# Altium PCB PCB1.PcbDoc
Units mil, origin at the board's own origin, x right, y up, seen from the top; angles counter-clockwise.
Board outline 6000 x 4000 mil, 2 copper layers (Top Layer, Bottom Layer); 147 components, 144 nets, 687 pads, 0 vias.
Unrouted connection lines stored in the file: 398.
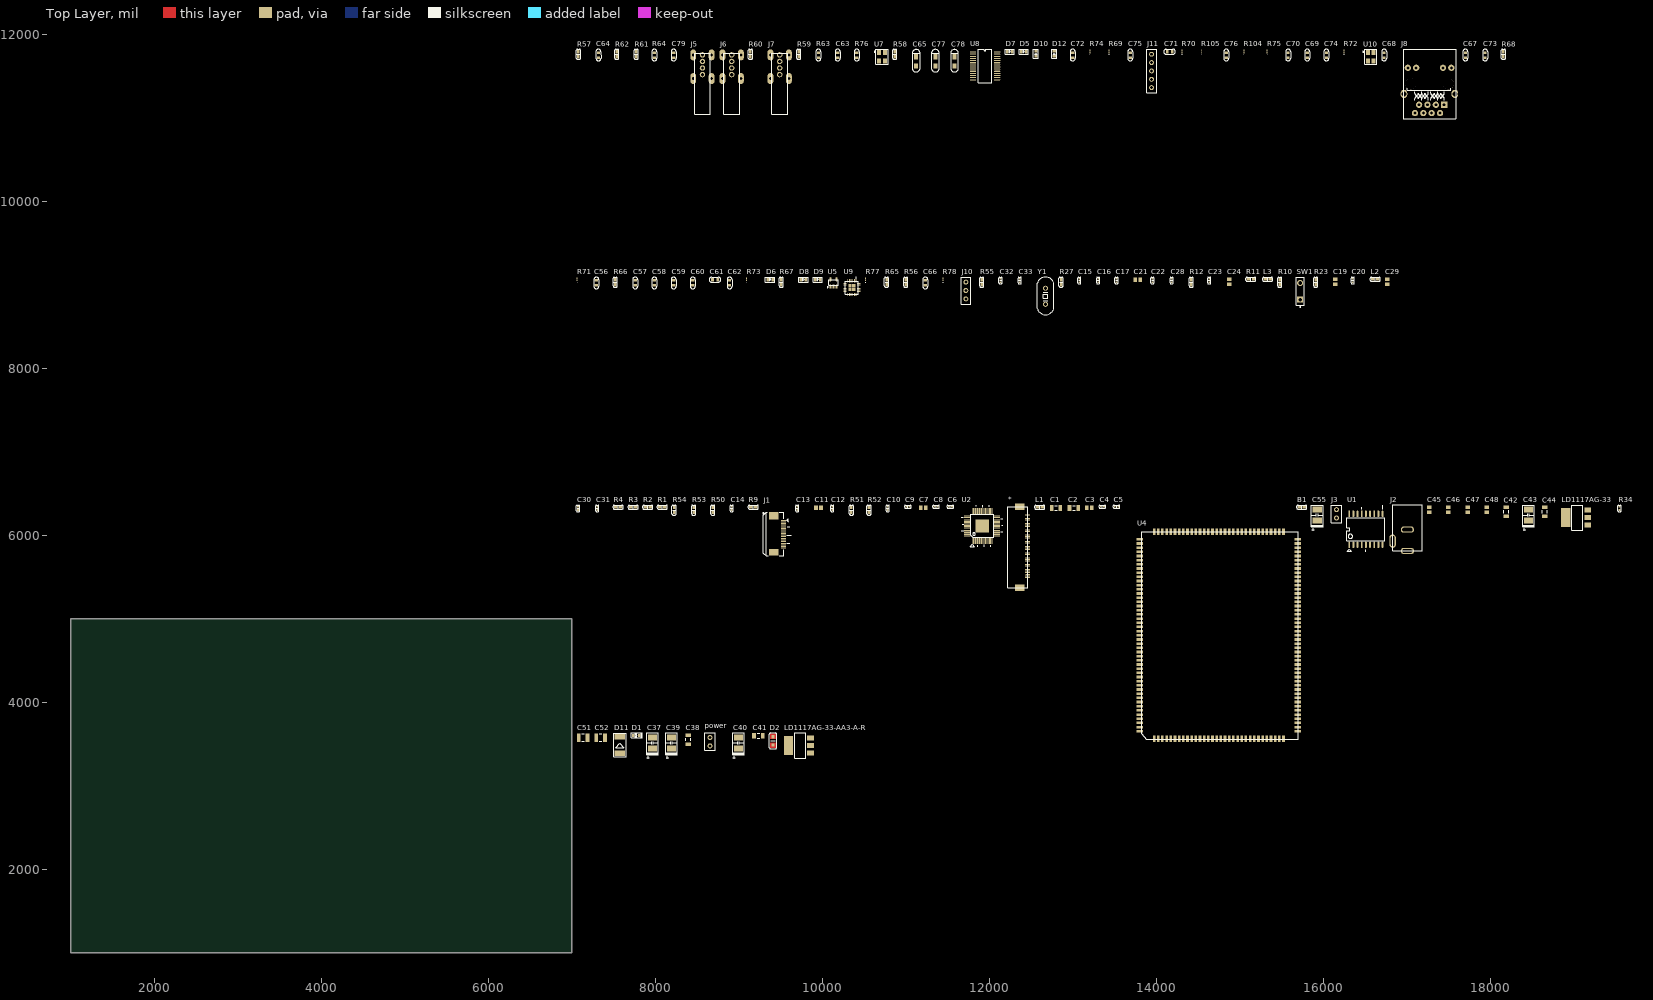
[diagram p0: Top Layer view]
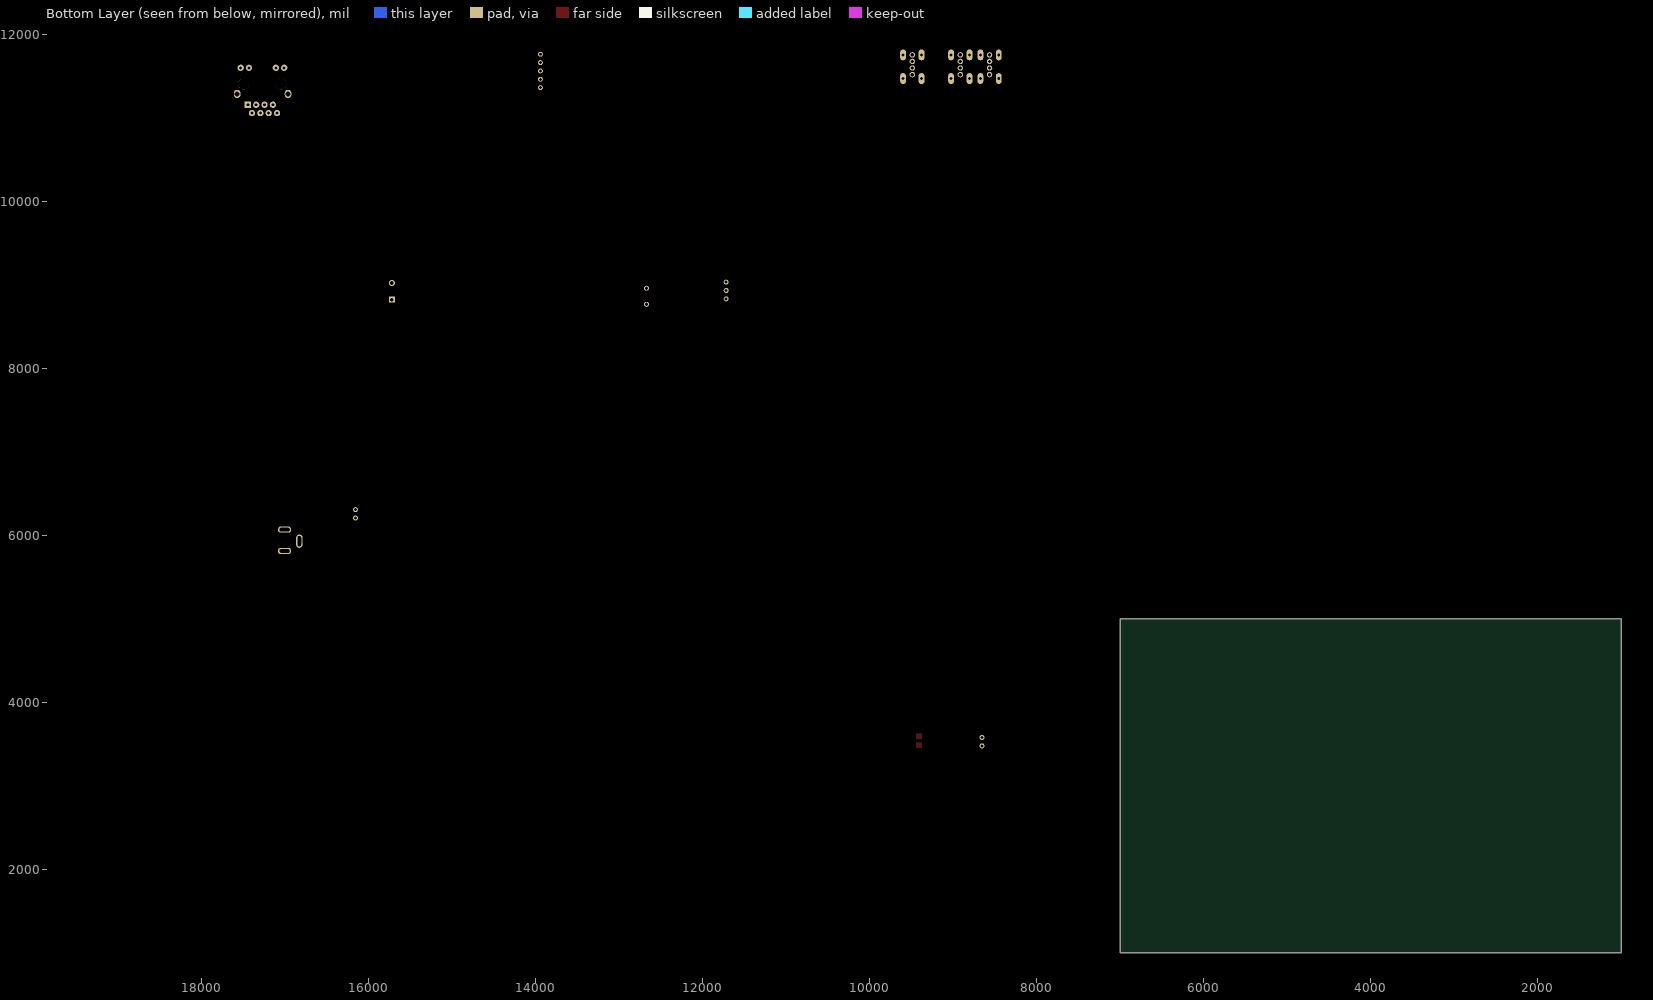
[diagram p1: Bottom Layer view, seen from below]

## Layer stack, top to bottom
Top Layer: signal copper 1.4
Dielectric: dielectric 12.6, FR-4, Dk 4.8
Bottom Layer: signal copper 1.4

## Board outline
1000,1000 7000,1000 7000,5000 1000,5000

## Design rules (kind name [scope] priority, off if disabled: settings)
Clearance [All] p1: gap=10
PolygonConnect [All] p1: connectstyle=Relief reliefconductorwidth=10 reliefentries=4 polygonreliefangle="90 Angle"
RoomDefinition V72单CIS [InComponentClass('V72单CIS')] p1: confinementstyle=ConfineIn formatcopy=TRUE lockcomponents=FALSE outline 7045,3310 19715,3310 19715,11930 7045,11930
RoutingVias [All] p1: holewidth=28 width=50 viastyle="Through Hole" minholewidth=28 minwidth=50 maxholewidth=28 maxwidth=50
SilkscreenOverComponentPads SilkToSolderMaskClearance [IsPad] p1: minsilkscreentomaskgap=10
SolderMaskExpansion [All] p1: expansion=4
Width [All] p1: maxlimit=10 minlimit=10 preferedwidth=10
27 further rules are at their usual default settings.

## Components (designator, comment, footprint, x,y, rotation, side; value= is the part's Value field where it differs from the comment)
* "FPC-40PIN" FPC-40PIN 12355,5865 r90 top
B1 "600R_BEAD" R0603 15745,6335 r0 top
C1 "22uF" C1206 12800,6325 r0 top
C2 "22uF" C1206 13015,6325 r0 top
C3 "10uF" C0805 13200,6330 r0 top
C4 "0.1uF" C0402 18945,6810 r0 top
C5 "0.1uF" C0402 19115,6810 r0 top
C6 "0.1uF" C0402 17125,6810 r0 top
C7 "10uF" C0805 11210,6330 r0 top
C8 "0.1uF" C0402 16955,6810 r0 top
C9 "0.1uF" C0402 16615,6810 r0 top
C10 "0.1uF" C0402 10315,11910 r90 top
C11 "10uF" C0805 9955,6330 r0 top
C12 "0.1uF" C0402 9650,11910 r90 top
C13 "0.1uF" C0402 9230,11910 r90 top
C14 "0.1uF" C0402 8445,11910 r90 top
C15 "100pF" C0402 12610,14640 r90 top
C16 "100pF" C0402 12835,14640 r90 top
C17 "100pF" C0402 13055,14640 r90 top
C19 "10uF" C0805 16145,9035 r90 top
C20 "0.1uF" C0402 15885,14640 r90 top
C21 "10uF" C0805 13780,9060 r0 top
C22 "0.1uF" C0402 13485,14640 r90 top
C23 "0.1uF" C0402 14165,14640 r90 top
C24 "10uF" C0805 14875,9035 r90 top
C28 "0.1uF" C0402 13715,14640 r90 top
C29 "10uF" C0805 16770,9035 r90 top
C30 "0.1uF" C0402 6605,11910 r90 top
C31 "0.1uF" C0402 6835,11910 r90 top
C32 "20pF" C0402 11665,14640 r90 top
C33 "20pF" C0402 11895,14640 r90 top
C37 "100uF" BCASE 7960,3510 r90 top
C38 "10uF" C1206 8395,3550 r90 top
C39 "100uF" BCASE 8190,3510 r90 top
C40 "100uF" BCASE 8990,3510 r90 top
C41 "10uF" C1206 9235,3595 r0 top
C42 "10uF" C1206 18195,6280 r90 top
C43 "100uF" BCASE 18455,6240 r90 top
C44 "10uF" C1206 18655,6280 r90 top
C45 "10uF" C0805 17270,6305 r90 top
C46 "10uF" C0805 17500,6305 r90 top
C47 "10uF" C0805 17730,6305 r90 top
C48 "10uF" C0805 17960,6305 r90 top
C51 "100uF" C1210 7135,3575 r0 top
C52 "100uF" C1210 7345,3575 r0 top
C55 "100uF" BCASE 15925,6240 r90 top
C56 "10uF" 0603A 7295,9020 r90 top
C57 "1uF" 0603A 7760,9020 r90 top
C58 "10uF" 0603A 7990,9020 r90 top
C59 "1uF" 0603A 8220,9020 r90 top
C60 "1uF" 0603A 8450,9020 r90 top
C61 "1uF" 0603A 8715,9060 r0 top
C62 "1uF" 0603A 8890,9020 r90 top
C63 "33pF" 0603A 10185,11750 r90 top
C64 "33pF" 0603A 7320,11750 r90 top
C65 "10uF" 3126A 11095,11680 r90 top
C66 "104" 0603A 11235,9020 r90 top
C67 "104" 0603A 17705,11750 r90 top
C68 "104" 0603A 16730,11750 r90 top
C69 "104" 0603A 15810,11750 r90 top
C70 "104" 0603A 15580,11750 r90 top
C71 "104" 0603A 14160,11790 r0 top
C72 "104" 0603A 13000,11750 r90 top
C73 "104" 0603A 17940,11750 r90 top
C74 "22pF" 0603A 16040,11750 r90 top
C75 "22pF" 0603A 13690,11750 r90 top
C76 "103" 0603A 14840,11750 r90 top
C77 "10uF" 3126A 11325,11680 r90 top
C78 "10uF" 3126A 11555,11680 r90 top
C79 "1uF" 0603A 8220,11750 r90 top
D1 "LED0" LED_0603 7770,3600 r0 top
D2 "DIODE" R1206 9405,3535 r90 top
D5 "ESD5" ESD_0603 12415,11795 r0 top
D6 "ESD6" ESD_0603 9375,9065 r0 top
D7 "ESD7" ESD_0603 12245,11795 r0 top
D8 "ESD8" ESD_0603 9775,9065 r0 top
D9 "ESD9" ESD_0603 9945,9065 r0 top
D10 "ESD10" ESD_0603 12555,11765 r90 top
D11 "TVS1" DO-214AB 7575,3475 r90 top
D12 "ESD12" ESD_0603 12775,11765 r90 top
J1 "18PIN_CIS" 18PIN_FPC 9440,5970 r0 top
J2 "DC-5V" DC-5V 17010,5810 r0 top
J3 "2PIN_PITCH_2.54MM" 2PIN_PITCH_2.54MM 29795,10980 r0 top
J5 "USB-A8" USB-A8 8565,11595 r0 top
J6 "USB-A8" USB-A8 8915,11595 r0 top
J7 "USB-A8" USB-A8 9490,11595 r0 top
J8 "RJ-45A12" RJ-45A12 17450,11155 r90 top
J10 "header3_2.54MM" HEADER3_2.54MM 11715,8910 r0 top
J11 "HEADER5*2_2.54MM" HEADER5_2.54MM 13945,11560 r0 top
L1 "PBY201209T-121Y-N" R0603 12605,6335 r0 top
L2 "CBG100505U301" R0603 16625,9065 r0 top
L3 "CBG100505U301" R0603 15335,9065 r0 top
LD1117AG-33 "SOT-223" SOT-223 19045,6210 r90 top
LD1117AG-33-AA3-A-R "SOT-223" SOT-223 9735,3480 r90 top
power "2PIN_PITCH_2.54MM" 2PIN_PITCH_2.54MM 22290,8250 r0 top
R1 "2" R0603 8085,6335 r0 top
R2 "18" R0603 7910,6335 r0 top
R3 "2" R0603 7735,6335 r0 top
R4 "27" R0603 7555,6335 r0 top
R9 "2" R0603 9175,6335 r0 top
R10 "22" R0603 15480,9030 r90 top
R11 "22" R0603 15135,9065 r0 top
R12 "22" R0603 14420,9030 r90 top
R23 "1K" R0603 15910,9030 r90 top
R27 "1M" R0603 12860,9030 r90 top
R34 "4.70k" R0402 19550,6320 r90 top
R50 "4.7K" R0603 8690,6300 r90 top
R51 "4.7K" R0603 10350,6300 r90 top
R52 "4.7K" R0603 10560,6300 r90 top
R53 "22R" R0603 8460,6300 r90 top
R54 "22R" R0603 8225,6300 r90 top
R55 "0R" R0603 11910,9030 r90 top
R56 "0R" R0603 11000,9030 r90 top
R57 "10K" R0603 7080,11760 r90 top
R58 "680R" R0603 10870,11760 r90 top
R59 "0R" R0603 9720,11760 r90 top
R60 "4.7k" R0603 9140,11760 r90 top
R61 "100k" R0603 7770,11760 r90 top
R62 "4.7k" R0603 7540,11760 r90 top
R63 "22k" 0603A 9955,11750 r90 top
R64 "47k" 0603A 7990,11750 r90 top
R65 "0R" R0603 10770,9030 r90 top
R66 "22R" R0603 7520,9030 r90 top
R67 "10K" R0603 9510,9030 r90 top
R68 "22R" R0603 18160,11760 r90 top
R69 "10k" 0603 13435,11795 r90 top
R70 "10k" 0603 14310,11795 r90 top
R71 "2.49k" 0603 7065,9065 r90 top
R72 "10k" 0603 16250,11795 r90 top
R73 "510R" 0603 9095,9065 r90 top
R74 "510R" 0603 13205,11795 r90 top
R75 "10k" 0603 15330,11795 r90 top
R76 "10K" 0603A 10415,11750 r90 top
R77 "470R" 0603 10520,9065 r90 top
R78 "470R" 0603 11445,9065 r90 top
R104 "0R" 0603 15050,11795 r90 top
R105 "0R" 0603 14540,11795 r90 top
SW1 "SW-PB" SPST-2 15725,8920 r90 top
U1 "ULN2803A_SOP18" ULN2803A 16510,6070 r0 top
U2 "HT82V72" HT82V72 11915,6110 r0 top
U4 "YPK_158_1.27D" YPK_158_1.27D 13844.49,5950.16 r90 top
U5 "XC6219B33AMR" XC6219B33AMR 10145,9005 r0 top
U7 "XTAL_12M" XTAL 10720,11745 r0 top
U8 "UG850G" GL850G 11950,11620 r0 top
U9 "RTL8152B" RTL8723BS 10355,8965 r0 top
U10 "25Mhz" XTAL 16575,11745 r0 top
Y1 "XTAL-12M" XTAL8M 12675,8865 r0 top

## Footprints (in the part's own frame and the unit in brackets; to place one, negate y for a bottom-side part, rotate by r counter-clockwise, add the part's x,y. Pads: shape width x height; smd on the part's side, far side on the other; paste and mask are expansions set on the pad)
2PIN_PITCH_2.54MM [mm]
  round 1.5 hole 0.9: 1(-346.329,-118.745) 2(-346.329,-121.285)
  silkscreen extent -347.98,-122.68 -344.68,-117.35
18PIN_FPC [mil]
  rect 60x11 smd: 1(95,207.49) 2(95,187.81) 3(95,168.12) 4(95,148.44) 5(95,128.75) 6(95,109.07) 7(95,89.38) 8(95,69.7) 9(95,50.01) 10(95,30.33) 11(95,10.64) 12(95,-9.04) 13(95,-28.73) 14(95,-48.41) 15(95,-68.1) 16(95,-87.78) 17(95,-107.47) 18(95,-127.15)
  rect 110x85 smd: _(-21,261.5)
  rect 110x77 smd: _/2(-21,-177.14)
  silkscreen extent -146,-217 187,302
0603 [mm] "Chip Inductor, Body 0.6x0.3mm, IPC High Density"
  rect 0.5x0.3 smd: 1(-0.35,0) 2(0.35,0)
  silkscreen extent -0.9,-0.05 -0.9,0.05, body extent -0.33,-0.18 0.33,0.18, height 0.55
0603A [mil]
  rect 30x40 smd: 1(-29.69,0.44) 2(30.31,0.44)
  silkscreen extent -69,-30 70,31
3126A [mil]
  rect 60x50 smd: 1(50.16,-29.77) 2(-59.84,-29.77)
  silkscreen extent -132,-77 138,17
BCASE [mil]
  rect 70x110 smd: 1(-65,-5) 2(65,-5)
  silkscreen extent -190,-75 120,65
C0402 [mil] "CAP"
  rect 20x20 smd: 1(-5610,-470) 2(-5570,-470)
  silkscreen extent -5629,-489 -5551,-451
C0805 [mm] "Chip Capacitor, Body 2.0x1.3mm, IPC High Density"
  rect 1.1x1.4 smd: 1(-0.75,0) 2(0.75,0)
  body extent -1.1,-0.72 1.1,0.72, height 1.4
C1206 [mm] "Chip Capacitor, Body 3.2x1.6mm, IPC High Density"
  rect 1.1x1.7 smd: 1(-1.35,0) 2(1.35,0)
  silkscreen extent -0.4,-0.75 0.4,0.75, body extent -1.7,-0.9 1.7,0.9, height 1.3
C1210 [mm] "Chip Capacitor, Body 3.2x2.5mm, IPC High Density"
  rect 1.1x2.6 smd: 1(-1.35,0) 2(1.35,0)
  silkscreen extent -0.4,-1.2 0.4,1.2, body extent -1.7,-1.35 1.7,1.35, height 1.3
DC-5V [mil]
  oval 160x75 hole 40 slot 120 at 0 deg: 1(0,0) 2(0,255.91)
  oval 75x160 hole 40 slot 120 at 90 deg: 3(-177.17,118.11)
  silkscreen extent -177,0 177,551
DO-214AB [mm]
  rect 1.6x3.1 smd: 1(-2.246,0) 2(2.754,0)
  silkscreen extent -3.35,-1.9 3.85,1.9
ESD_0603 [mil]
  rect 30x40 smd: 1(-29.69,-4.56) 2(30.31,-4.56)
  silkscreen extent -55,-34 55,26
FPC-40PIN [mil]
  oval 9x60 smd: 1(-393.7,-105) 2(-374.02,-105) 3(-354.33,-105) 4(-334.65,-105) 5(-314.96,-105) 6(-295.28,-105) 7(-275.59,-105) 8(-255.91,-105) 9(-236.22,-105) 10(-216.54,-105) 11(-196.85,-105) 12(-177.17,-105) 13(-157.48,-105) 14(-137.8,-105) 15(-118.11,-105) 16(-98.43,-105) 17(-78.74,-105) 18(-59.06,-105) 19(-39.37,-105) 20(-19.69,-105) 21(0,-105) 22(19.69,-105) 23(39.37,-105) 24(59.06,-105) 25(78.74,-105) 26(98.43,-105) 27(118.11,-105) 28(137.8,-105) 29(157.48,-105) 30(177.17,-105) 31(196.85,-105) 32(216.54,-105) 33(236.22,-105) 34(255.91,-105) 35(275.59,-105) 36(295.28,-105) 37(314.96,-105) 38(334.65,-105) 39(354.33,-105) 40(374.02,-105)
  rect 78.74x118.11 smd: 41(-493.7,-10) 42(474.02,-10)
  silkscreen extent -494,-105 474,135
GL850G [mil] "SSOP-28"
  oval 75x13 smd: 1(-145,166.4) 2(-145,140.8) 3(-145,115.2) 4(-145,89.6) 5(-145,64) 6(-145,38.4) 7(-145,12.8) 8(-145,-12.8) 9(-145,-38.4) 10(-145,-64) 11(-145,-89.6) 12(-145,-115.2) 13(-145,-140.8) 14(-145,-166.4) 15(145,-166.4) 16(145,-140.8) 17(145,-115.2) 18(145,-89.6) 19(145,-64) 20(145,-38.4) 21(145,-12.8) 22(145,12.8) 23(145,38.4) 24(145,64) 25(145,89.6) 26(145,115.2) 27(145,140.8) 28(145,166.4)
  silkscreen extent -80,-200 80,200
HEADER3_2.54MM [mm]
  round 1.5 hole 0.9: 1(0.127,3.048) 2(0.127,0.508) 3(0.127,-2.032)
  silkscreen extent -1.27,-3.68 1.65,4.57
HEADER5_2.54MM [mm]
  round 1.5 hole 0.9: 1(0,5.08) 2(0,2.54) 3(0,0) 4(0,-2.54) 5(0,-5.08)
  silkscreen extent -1.4,-6.6 1.52,6.6
HT82V72 [mm]
  oval 0.254x2 smd: 1(-3,-4.5) 2(-2.6,-4.5) 3(-2.2,-4.5) 4(-1.8,-4.5) 5(-1.4,-4.5) 6(-1,-4.5) 7(-0.6,-4.5) 8(-0.2,-4.5) 9(0.2,-4.5) 10(0.6,-4.5) 11(1,-4.5) 12(1.4,-4.5) 13(1.8,-4.5) 14(2.2,-4.5) 15(2.6,-4.5) 16(3,-4.5) 33(3,4.5) 34(2.6,4.5) 35(2.2,4.5) 36(1.8,4.5) 37(1.4,4.5) 38(1,4.5) 39(0.6,4.5) 40(0.2,4.5) 41(-0.2,4.5) 42(-0.6,4.5) 43(-1,4.5) 44(-1.4,4.5) 45(-1.8,4.5) 46(-2.2,4.5) 47(-2.6,4.5) 48(-3,4.5)
  oval 2x0.254 smd: 17(4.5,-3.012) 18(4.5,-2.612) 19(4.5,-2.212) 20(4.5,-1.812) 21(4.5,-1.412) 22(4.5,-1.012) 23(4.5,-0.612) 24(4.5,-0.212) 25(4.5,0.188) 26(4.5,0.588) 27(4.5,0.988) 28(4.5,1.388) 29(4.5,1.788) 30(4.5,2.188) 31(4.5,2.588) 32(4.5,2.988) 49(-4.5,2.988) 50(-4.5,2.588) 51(-4.5,2.188) 52(-4.5,1.788) 53(-4.5,1.388) 54(-4.5,0.988) 55(-4.5,0.588) 56(-4.5,0.188) 57(-4.5,-0.212) 58(-4.5,-0.612) 59(-4.5,-1.012) 60(-4.5,-1.412) 61(-4.5,-1.812) 62(-4.5,-2.212) 63(-4.5,-2.612) 64(-4.5,-3.012)
  rect 4.06x4.06 smd: 65(0,0)
  silkscreen extent -6.31,-6.35 6.35,6.35
LED_0603 [mil]
  rect 30x35 smd: 1(-35,0) 2(35,0)
  silkscreen extent -60,-30 71,30
R0402 [mil]
  rect 20x20 smd: 1(-20,0) 2(20,0)
  silkscreen extent -39,-19 39,19
R0603 [mil]
  rect 40x30 smd: 1(-30,0) 2(30,0)
  silkscreen extent -60,-25 60,25
R1206 [mil]
  rect 40x40 smd: 1(-50,-5) 2(50,-5)
  Top Layer region: -23.62,26.5 -23.62,-36.5 -82.68,-36.5 -82.68,26.5 -23.62,26.5
  Top Layer region: 23.62,-36.5 23.62,26.5 82.68,26.5 82.68,-36.5 23.62,-36.5
  silkscreen extent -94,-48 94,38
RJ-45A12 [mm]
  rect 1.905x1.905 hole 0.9: 1(0,0)
  round 1.905 hole 0.9: 2(-2.54,1.27) 3(0,2.54) 4(-2.54,3.81) 5(0,5.08) 6(-2.54,6.35) 7(0,7.62) 8(-2.54,8.89) 9(11.25,-2.18) 10(11.25,0.36) 11(11.25,8.53) 12(11.25,11.07)
  oval 2.5x2 hole 1.5: 13(3.3,-3.25) 14(3.3,12.23)
  round 3.302 hole 3.5: 15(6.35,-1.27) 16(6.35,10.16)
  silkscreen extent -4.19,-3.56 16.89,12.45
RTL8723BS [mm]
  rect 0.25x1 smd paste-0.025: 1(1.25,2.1) 2(0.75,2.1) 3(0.25,2.1) 4(-0.25,2.1) 5(-0.75,2.1) 6(-1.25,2.1) 13(-1.25,-2.1) 14(-0.75,-2.1) 15(-0.25,-2.1) 16(0.25,-2.1) 17(0.75,-2.1) 18(1.25,-2.1)
  rect 1x0.25 smd paste-0.025: 7(-2.1,1.25) 8(-2.1,0.75) 9(-2.1,0.25) 10(-2.1,-0.25) 11(-2.1,-0.75) 12(-2.1,-1.25) 19(2.1,-1.25) 20(2.1,-0.75) 21(2.1,-0.25) 22(2.1,0.25) 23(2.1,0.75) 24(2.1,1.25)
  rect 1x1 smd: 25(0.6,0.6) 26(-0.6,0.6) 27(-0.6,-0.6) 28(0.6,-0.6)
  silkscreen extent -2,-2 2,3.1
SOT-223 [mil]
  rect 60x80 smd: 1(-90.55,-125) 2(0,-125) 3(90.55,-125)
  rect 230x110 smd: 4(0,138)
  silkscreen extent -150,-65 150,65
SPST-2 [mm] "Switch; 2 Leads"
  rect 1.85x1.85 hole 1.1: 1(-2.54,0)
  round 1.85 hole 1.1: 2(2.54,0)
  silkscreen extent -4.89,-1.27 4.28,1.27
ULN2803A [mm] "SOP18"
  oval 0.559x1.95 smd: 1(-5.03,-4.7) 2(-3.76,-4.7) 3(-2.49,-4.7) 4(-1.22,-4.7) 5(0.05,-4.7) 6(1.32,-4.7) 7(2.59,-4.7) 8(3.86,-4.7) 9(5.13,-4.7) 10(5.13,4.7) 11(3.86,4.7) 12(2.59,4.7) 13(1.32,4.7) 14(0.05,4.7) 15(-1.22,4.7) 16(-2.49,4.7) 17(-3.76,4.7) 18(-5.03,4.7)
  silkscreen extent -5.77,-6.86 5.77,7.37
USB-A8 [mil]
  round 65 hole 40: 1(0,-78.74) 2(0,0) 3(0,78.74) 4(0,157.48)
  oval 70.87x130 hole 35: 5(110,157.48) 6(-110,157.48) 7(-110,-125.98) 8(110,-125.98)
  silkscreen extent -95,-551 94,176
XC6219B33AMR [mm]
  oval 0.6x1.3 smd: 1(-1.204,-0.719) 2(-0.254,-0.719) 3(0.696,-0.719) 4(0.696,1.481) 5(-1.204,1.481)
  silkscreen extent -2.15,-1.01 1.2,1.38
XTAL [mm]
  rect 1.2x1.5 smd: 1(-1.016,0.889) 2(-1.016,-1.611) 3(0.784,-1.611) 4(0.784,0.889)
  silkscreen extent -2.54,-2.61 1.78,1.89
XTAL8M [mil]
  round 60 hole 37: 1(0,-100) 2(0,92.13)
  silkscreen extent -100,-225 100,225
YPK_158_1.27D [mm] "A33_core"
  rect 2x0.8 smd: 1(-60.71,-3.315) 2(-60.71,-4.585) 3(-60.71,-5.855) 4(-60.71,-7.125) 5(-60.71,-8.395) 6(-60.71,-9.665) 7(-60.71,-10.935) 8(-60.71,-12.205) 9(-60.71,-13.475) 10(-60.71,-14.745) 11(-60.71,-16.015) 12(-60.71,-17.285) 13(-60.71,-18.555) 14(-60.71,-19.825) 15(-60.71,-21.095) 16(-60.71,-22.365) 17(-60.71,-23.635) 18(-60.71,-24.905) 19(-60.71,-26.175) 20(-60.71,-27.445) 21(-60.71,-28.715) 22(-60.71,-29.985) 23(-60.71,-31.255) 24(-60.71,-32.525) 25(-60.71,-33.795) 26(-60.71,-35.065) 27(-60.71,-36.335) 28(-60.71,-37.605) 29(-60.71,-38.875) 30(-60.71,-40.145) 31(-60.71,-41.415) 32(-60.71,-42.685) 80(2.29,-42.685) 81(2.29,-41.415) 82(2.29,-40.145) 83(2.29,-38.875) 84(2.29,-37.605) 85(2.29,-36.335) 86(2.29,-35.065) 87(2.29,-33.795) 88(2.29,-32.525) 89(2.29,-31.255) 90(2.29,-29.985) 91(2.29,-28.715) 92(2.29,-27.445) 93(2.29,-26.175) 94(2.29,-24.905) 95(2.29,-23.635) 96(2.29,-22.365) 97(2.29,-21.095) 98(2.29,-19.825) 99(2.29,-18.555) 100(2.29,-17.285) 101(2.29,-16.015) 102(2.29,-14.745) 103(2.29,-13.475) 104(2.29,-12.205) 105(2.29,-10.935) 106(2.29,-9.665) 107(2.29,-8.395) 108(2.29,-7.125) 109(2.29,-5.855) 110(2.29,-4.585) 111(2.29,-3.315)
  rect 0.8x2 smd: 33(-58.42,-47) 34(-57.15,-47) 35(-55.88,-47) 36(-54.61,-47) 37(-53.34,-47) 38(-52.07,-47) 39(-50.8,-47) 40(-49.53,-47) 41(-48.26,-47) 42(-46.99,-47) 43(-45.72,-47) 44(-44.45,-47) 45(-43.18,-47) 46(-41.91,-47) 47(-40.64,-47) 48(-39.37,-47) 49(-38.1,-47) 50(-36.83,-47) 51(-35.56,-47) 52(-34.29,-47) 53(-33.02,-47) 54(-31.75,-47) 55(-30.48,-47) 56(-29.21,-47) 57(-27.94,-47) 58(-26.67,-47) 59(-25.4,-47) 60(-24.13,-47) 61(-22.86,-47) 62(-21.59,-47) 63(-20.32,-47) 64(-19.05,-47) 65(-17.78,-47) 66(-16.51,-47) 67(-15.24,-47) 68(-13.97,-47) 69(-12.7,-47) 70(-11.43,-47) 71(-10.16,-47) 72(-8.89,-47) 73(-7.62,-47) 74(-6.35,-47) 75(-5.08,-47) 76(-3.81,-47) 77(-2.54,-47) 78(-1.27,-47) 79(0,-47) 112(0,1) 113(-1.27,1) 114(-2.54,1) 115(-3.81,1) 116(-5.08,1) 117(-6.35,1) 118(-7.62,1) 119(-8.89,1) 120(-10.16,1) 121(-11.43,1) 122(-12.7,1) 123(-13.97,1) 124(-15.24,1) 125(-16.51,1) 126(-17.78,1) 127(-19.05,1) 128(-20.32,1) 129(-21.59,1) 130(-22.86,1) 131(-24.13,1) 132(-25.4,1) 133(-26.67,1) 134(-27.94,1) 135(-29.21,1) 136(-30.48,1) 137(-31.75,1) 138(-33.02,1) 139(-34.29,1) 140(-35.56,1) 141(-36.83,1) 142(-38.1,1) 143(-39.37,1) 144(-40.64,1) 145(-41.91,1) 146(-43.18,1) 147(-44.45,1) 148(-45.72,1) 149(-46.99,1) 150(-48.26,1) 151(-49.53,1) 152(-50.8,1) 153(-52.07,1) 154(-53.34,1) 155(-54.61,1) 156(-55.88,1) 157(-57.15,1) 158(-58.42,1)
  silkscreen extent -60.82,-47.24 2.29,0.5

## Part data
B1 L2 L3: library part Inductor, "Inductor"
C1 C2 C3 C4 C5 C6 C7 C8 C9 C10 C11 C12 C13 C14 C15 C16 C17 C19 C20 C21 C22 C23 C24 C28 C29 C30 C31 C32 C33 C38 C41 C42 C44 C45 C46 C47 C48 C56 C57 C58 C59 C60 C61 C62 C63 C64 C66 C67 C68 C69 C70 C71 C72 C73 C74 C75 C76 C79: library part Cap, "Capacitor"
C37: library part Cap2, "电容"
C39 C40 C43 C51 C52 C55 C65 C77 C78: library part Cap2, "Capacitor"
D1: "Typical INFRARED GaAs LED"
D2: library part "Diode 1N4149", "Computer Diode"
D5 D6 D7 D8 D9 D10 D12: library part "Diode BAS70", "Silicon AF Schottky Diode for High-Speed Switching"
D11: library part "D Schottky", "TVS二极管5V"
J8: "HR911105A"
L1: library part Inductor, "电感"
LD1117AG-33 LD1117AG-33-AA3-A-R: library part LD1117S33TR
R1 R2 R3 R4 R9 R10 R11 R12 R23 R27 R34 R50 R51 R52 R55 R56 R57 R58 R59 R60 R61 R62 R63 R64 R65 R66 R67 R68 R69 R70 R71 R72 R73 R74 R75 R76 R77 R78 R104 R105: library part Res1, "Resistor"
R53 R54: library part Res2, "Resistor"
SW1: "Switch"
U10: library part XTAL_12M
Y1: library part XTAL, "Crystal Oscillator"

## Nets (pads, with @x,y where several pads share a name; then routed paths per layer and width w, separated by ;. In a path a pad name is that pad's centre, name@x,y a point inside that pad or via, vN(x,y) a via of type N, cw(c..) or ccw(c..) an arc to the next point about the centre after c; other vN are vias at no path point)
A0: U2.22 U4.56
A1: U2.21 U4.55
A2: U2.20 U4.58
A3: U2.19 U4.57
A4: U2.18 U4.60
A5: U2.17 U4.59
A6: U2.16 U4.62
A7: U2.15 U4.61
AP-UART2-RX: R77.1 U4.127
AP-UART2-TX: R78.1 U4.128
AVDD33V: C60.2 C62.2 R56.2 U8.5 U8.10
CIS_BLED: U1.3 U2.12
CIS_CLK: J1.12 U2.8
CIS_GLED: U1.2 U2.10
CIS_IRLED: U1.4 U2.13
CIS_MODE: J1.8 U2.5
CIS_RLED: U1.1 U2.11
CIS_SP: J1.10 U2.6
CIS_UVLED: U1.5 U2.14
DC-5V: B1.1 C1.2 C2.2 C37.1 C38.2 C42.2 C51.1 C52.1 C56.2 C65.1 C77.1 C78.1 D1.1 D2.2 D11.2 J1.13 J5.1 J6.1 J7.1 LD1117AG-33-AA3-A-R.3 LD1117AG-33.3 R59.2 R62.2 R63.2 R65.1 R67.1 U1.10 U4.26 U5.1
DM1: J5.2 U8.27
DM2: J6.2 U8.2
DM3: J7.2 U8.8
DM4: R66.1 U8.11
DP1: J5.3 U8.28
DP2: J6.3 U8.3
DP3: J7.3 U8.9
DP4: R68.1 U8.12
FRAME_START: J11.1 U2.40
GND: *.11 *.20 *.29 *.41 *.42 C1.1 C2.1 C3.1 C4.1 C5.1 C6.2 C9.2 C10.2 C13.2 C14.2 C15.1 C16.1 C17.1 C19.1 C20.1 C21.1 C22.1 C23.1 C24.1 C28.2 C29.1 C30.2 C31.2 C32.1 C33.1 C37.2 C38.1 C39.2 C40.2 C41.1 C42.1 C43.2 C44.1 C45.1 C46.1 C47.1 C48.1 C51.2 C52.2 C55.2 C56.1 C57.1 C58.1 C59.1 C60.1 C61.1 C62.1 C63.2 C64.2 C65.2 C66.1 C67.2 C68.2 C69.2 C70.2 C71.2 C72.2 C73.2 C74.2 C75.2 C76.2 C77.2 C78.2 C79.1 D11.1 J1.2 J1.4 J1.11 J2.2 J2.3 J3.2 J5.4 J5.5 J5.6 J5.7 J5.8 J6.4 J6.5 J6.6 J6.7 J6.8 J7.4 J7.5 J7.6 J7.7 J7.8 J8.8 J11.3 LD1117AG-33-AA3-A-R.1 LD1117AG-33.1 power.2 R34.2 R57.2 R58.1 R64.1 R67.2 R71.2 R75.2 SW1.2 U1.9 U2.9 U2.26 U2.39 U2.43 U2.46 U2.47 U2.51 U2.60 U2.64 U4.20 U4.32 U4.33 U4.34 U4.35 U4.36 U4.49 U4.65 U4.76 U4.81 U4.111 U4.114 U4.117 U5.2 U5.3 U7.2 U8.15 U9.6 U9.25 U9.26 U9.27 U9.28 U10.2
HD_MWEN: U2.36 U4.47
HUB-RST: C79.2 R76.2 U8.13
HUB-V33: R60.2 R61.2 R76.1 U8.1 U8.16
HUB-X1: C63.1 U7.1 U8.6
HUB-X2: C64.1 U7.3 U8.7
HUB_V33: C57.2 C58.2 C59.2 C61.2 R55.1 R56.1 U5.5 U8.24
LCD-BL-EN: R104.1 U4.132
LCD-CLK: *.36 U4.80
LCD-D2: *.5 U4.99
LCD-D3: *.6 U4.98
LCD-D4: *.7 U4.97
LCD-D5: *.8 U4.96
LCD-D6: *.9 U4.95
LCD-D7: *.10 U4.94
LCD-D10: *.14 U4.87
LCD-D11: *.15 U4.86
LCD-D12: *.16 U4.85
LCD-D13: *.17 U4.84
LCD-D14: *.18 U4.83
LCD-D15: *.19 U4.82
LCD-D18: *.23 U4.93
LCD-D19: *.24 U4.92
LCD-D20: *.25 U4.91
LCD-D21: *.26 U4.90
LCD-D22: *.27 U4.89
LCD-D23: *.28 U4.88
LCD-DE: *.33 U4.79
LCD-HSYNC: R54.1 U4.78
LCD-RST: R105.1 U4.131
LCD-VSYNC: R53.1 U4.77
LED_BAN: R3.1 U1.16
LED_GAN: R1.1 U1.17
LED_IRAN: R4.1 U1.15
LED_RAN: R2.1 U1.18
LED_UVLED: J3.1 U1.14
MCLK: J11.2 U2.42
Net*_1: *.1 *.2 B1.2 C55.1
Net*_30: *.30 R50.2
Net*_34: *.34 R53.2
Net*_35: *.35 R54.2
NET_1V0: C67.1 C72.1 C73.1 U9.9 U9.16 U9.23
NET_3V3: C66.2 C68.1 C71.1 D6.1 D7.1 J8.9 J8.12 R55.2 R69.1 R70.2 R72.2 U9.1 U9.10 U9.13
NET_5V: C70.1 R65.2 U9.11
NET_LED_LINK: R73.1 U9.15
NET_LED_TXRX: R74.1 U9.17
NET_RXIN: J8.6 U9.5
NET_RXIP: J8.3 U9.4
NET_TXON: J8.2 U9.3
NET_TXOP: J8.1 U9.2
NetC6_1: C6.1 C7.2 C8.1 U2.48
NetC7_1: C7.1 C8.2 C9.1 U2.49
NetC10_1: C10.1 C11.2 C12.1 U2.62
NetC11_1: C11.1 C12.2 C13.1 U2.63
NetC14_1: C14.1 R9.2 U2.52
NetC19_2: C19.2 C20.2 L2.2 U2.50
NetC21_2: C21.2 C22.2 L3.2 U2.61
NetC23_2: C23.2 U2.44
NetC32_2: C32.2 R27.1 U2.33 Y1.1
NetC33_2: C33.2 R27.2 U2.34 Y1.2
NetC69_1: C69.1 U9.12
NetC74_1: C74.1 U9.22 U10.3
NetC75_1: C75.1 U9.20 U10.1
NetC76_1: C76.1 J8.13 J8.14 R75.1
NetD1_2: D1.2 R34.1
NetD5_1: D5.1 J8.10 R74.2
NetD8_1: D8.1 R77.2
NetD9_1: D9.1 J10.1 R78.2
NetJ1_14: J1.14 R1.2
NetJ1_15: J1.15 R2.2
NetJ1_16: J1.16 R3.2
NetJ1_17: J1.17 R4.2
NetJ8_11: J8.11 R73.2
NetR57_1: R57.1 U8.14
NetR58_2: R58.2 U8.4
NetR59_1: R59.1 U8.23
NetR60_1: R60.1 U8.22
NetR61_1: R61.1 U8.18
NetR62_1: R62.1 U8.17
NetR63_1: R63.1 R64.2 U8.21
NetR66_2: R66.2 U9.7
NetR68_2: R68.2 U9.8
NetR69_2: R69.2 U9.14
NetR70_1: R70.1 U9.18
NetR71_1: R71.1 U9.24
NetR72_1: R72.1 U9.19
PCLK: U2.38 U4.50
PVDD_3V3: R23.2 U2.7 U2.23 U2.37
PVDDREG_3V3: C29.2 C30.1 C31.1 U2.45
RSTN: C24.2 C28.1 R23.1 SW1.1 U2.41 U4.19
SPI0_CLK: U2.2 U4.9
SPI0_CS: U2.1 U4.10
SPI0_MISO: U2.4 U4.7
SPI0_MOSI: U2.3 U4.8
TP-INT: *.39 U4.153
TP-RST: *.37 *.38 U4.133
TP-SCK: *.32 R52.2 U4.2
TP-SDA: *.31 R51.2 U4.1
UART3-RX: D10.1 J11.4 R105.2
UART3-TX: D12.1 J11.5 R104.2
USB-DM1: U4.112 U8.25
USB-DP1: U4.113 U8.26
VCC-3V0: R50.1 R51.1 R52.1 U4.43 U4.44
VCC_3V3: C3.2 C4.2 C5.2 C40.1 C41.2 C45.2 C46.2 J1.6 J1.9 LD1117AG-33-AA3-A-R.2
VCC_3V3_AVDD: C43.1 C44.2 C47.2 C48.2 L1.2 LD1117AG-33.2
VCC_3V3A: L1.1 L2.1 L3.1
VCC_5V_UV: C39.1 D2.1 J2.1 power.1
VD_MOEN: U2.35 U4.46
VIN1_A: C15.2 R10.2 U2.53
VIN1A: J1.1 R10.1
VIN2_A: C16.2 R11.2 U2.54
VIN2A: J1.3 R11.1
VIN3_A: C17.2 R12.2 U2.55
VIN3A: J1.5 R12.1
VREFA: J1.7 R9.1
pads on no net: *.3 *.4 *.12 *.13 *.21 *.22 *.40 D5.2 D6.2 D7.2 D8.2 D9.2 D10.2 D12.2 J1.18 J1._ J1._/2 J8.4 J8.5 J8.7 J8.15 J8.16 J10.2 J10.3 LD1117AG-33-AA3-A-R.4 LD1117AG-33.4 U1.6 U1.7 U1.8 U1.11 U1.12 U1.13 U2.24 U2.25 U2.27 U2.28 U2.29 U2.30 U2.31 U2.32 U2.56 U2.57 U2.58 U2.59 U2.65 U4.3 U4.4 U4.5 U4.6 U4.11 U4.12 U4.13 U4.14 U4.15 U4.16 U4.17 U4.18 U4.21 U4.22 U4.23 U4.24 U4.25 U4.27 U4.28 U4.29 U4.30 U4.31 U4.37 U4.38 U4.39 U4.40 U4.41 U4.42 U4.45 U4.48 U4.51 U4.52 U4.53 U4.54 U4.63 U4.64 U4.66 U4.67 U4.68 U4.69 U4.70 U4.71 U4.72 U4.73 U4.74 U4.75 U4.100 U4.101 U4.102 U4.103 U4.104 U4.105 U4.106 U4.107 U4.108 U4.109 U4.110 U4.115 U4.116 U4.118 U4.119 U4.120 U4.121 U4.122 U4.123 U4.124 U4.125 U4.126 U4.129 U4.130 U4.134 U4.135 U4.136 U4.137 U4.138 U4.139 U4.140 U4.141 U4.142 U4.143 U4.144 U4.145 U4.146 U4.147 U4.148 U4.149 U4.150 U4.151 U4.152 U4.154 U4.155 U4.156 U4.157 U4.158 U5.4 U7.4 U8.19 U8.20 U9.21 U10.4